# Altium PCB hat_template 2023.PcbDoc
Units mm, origin at the board's own origin, x right, y up, seen from the top; angles counter-clockwise.
Board outline 64 x 85 mm, 4 copper layers (Top Layer, Ground Plane, Power Plane, Bottom Layer), stack 0.844 mm thick; 3 components, 0 nets, 87 pads, 1 vias.
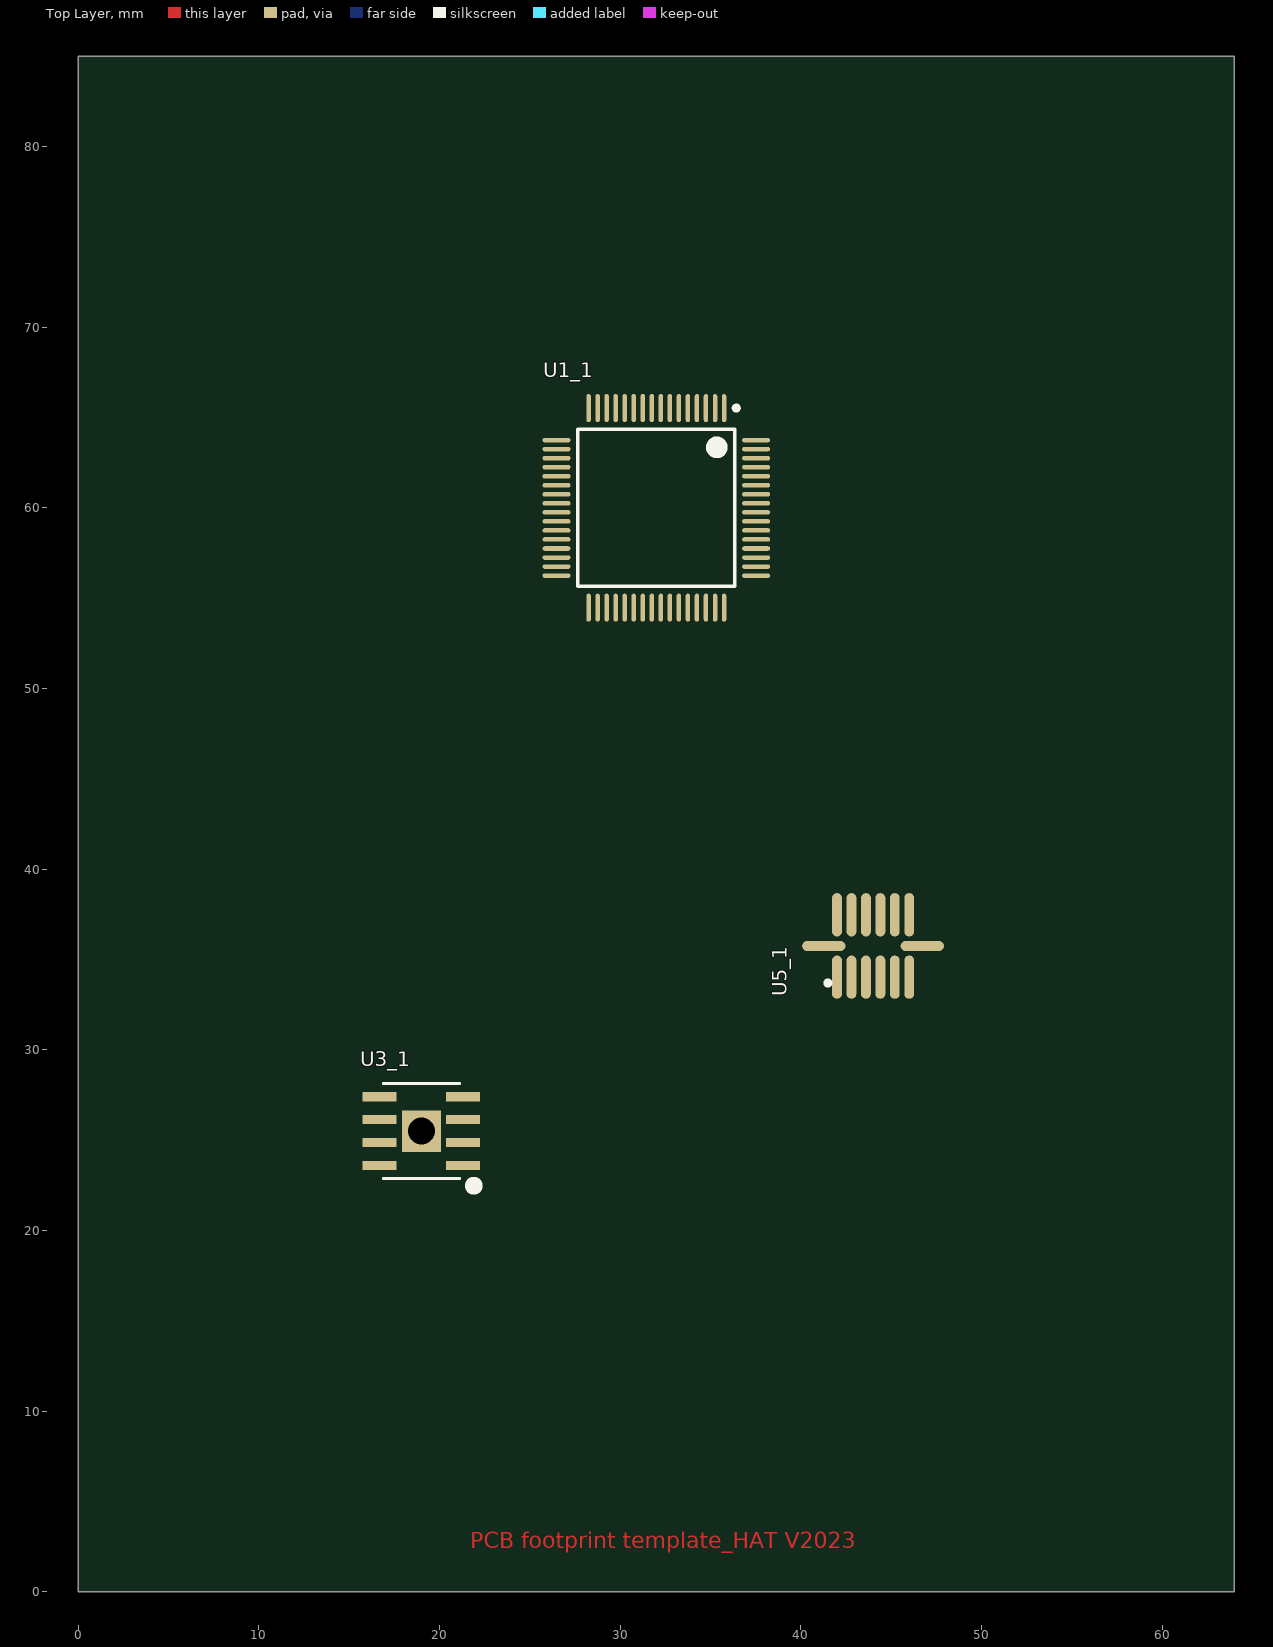
[diagram p0: Top Layer view]
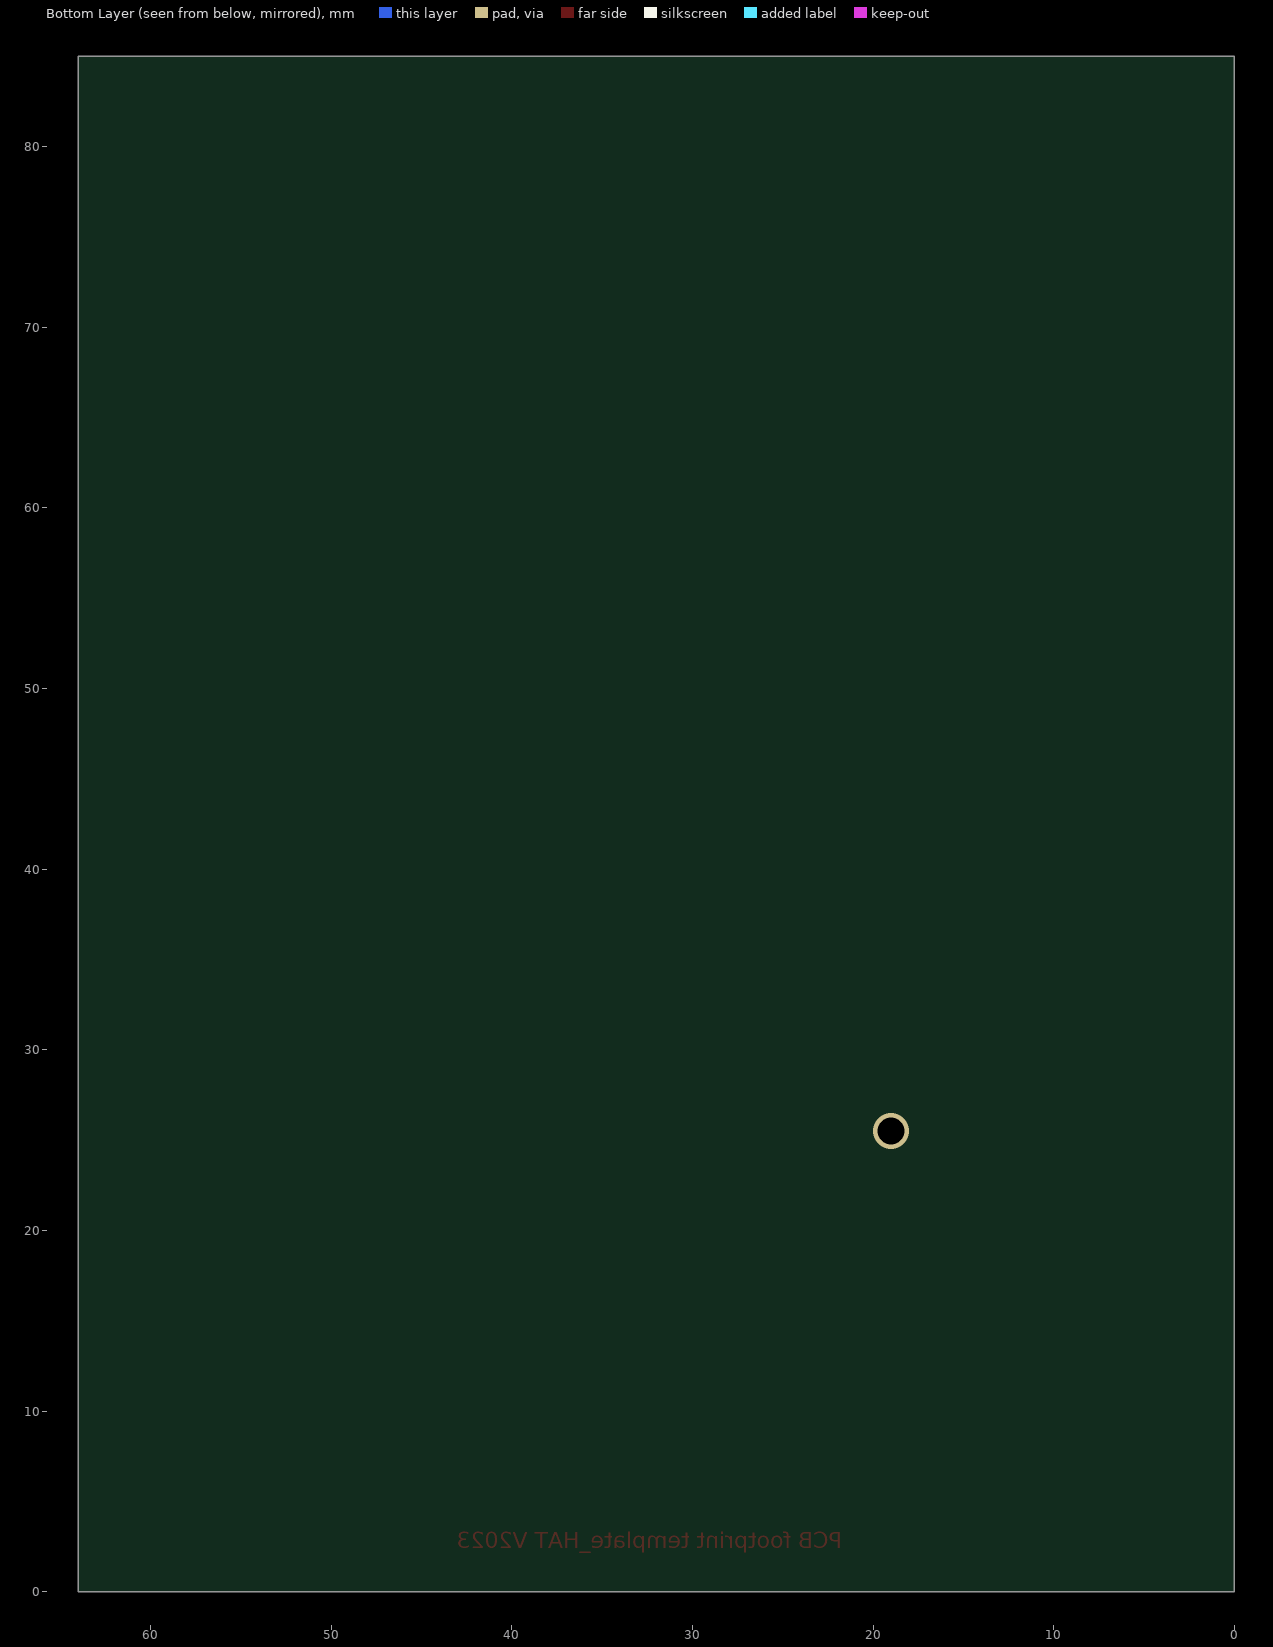
[diagram p1: Bottom Layer view, seen from below]
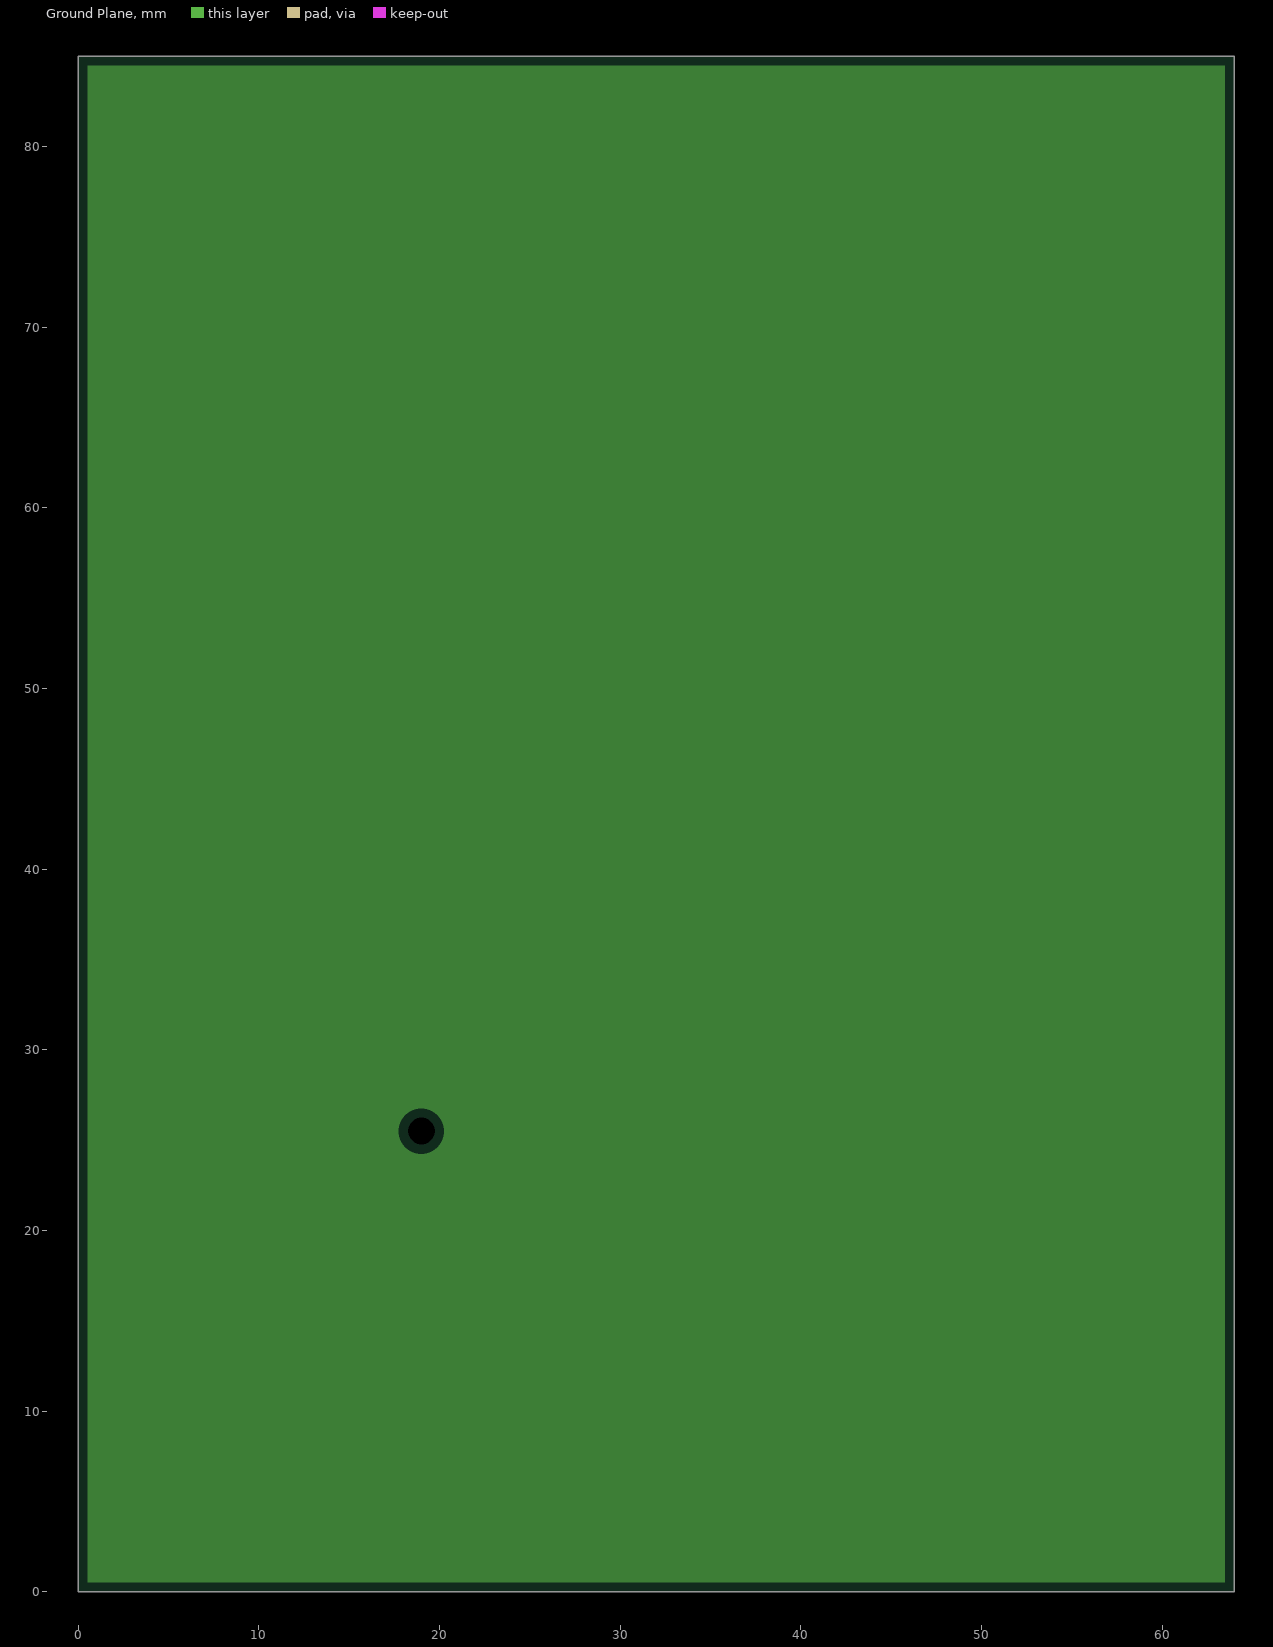
[diagram p2: Ground Plane, clearances drawn from the general rule]
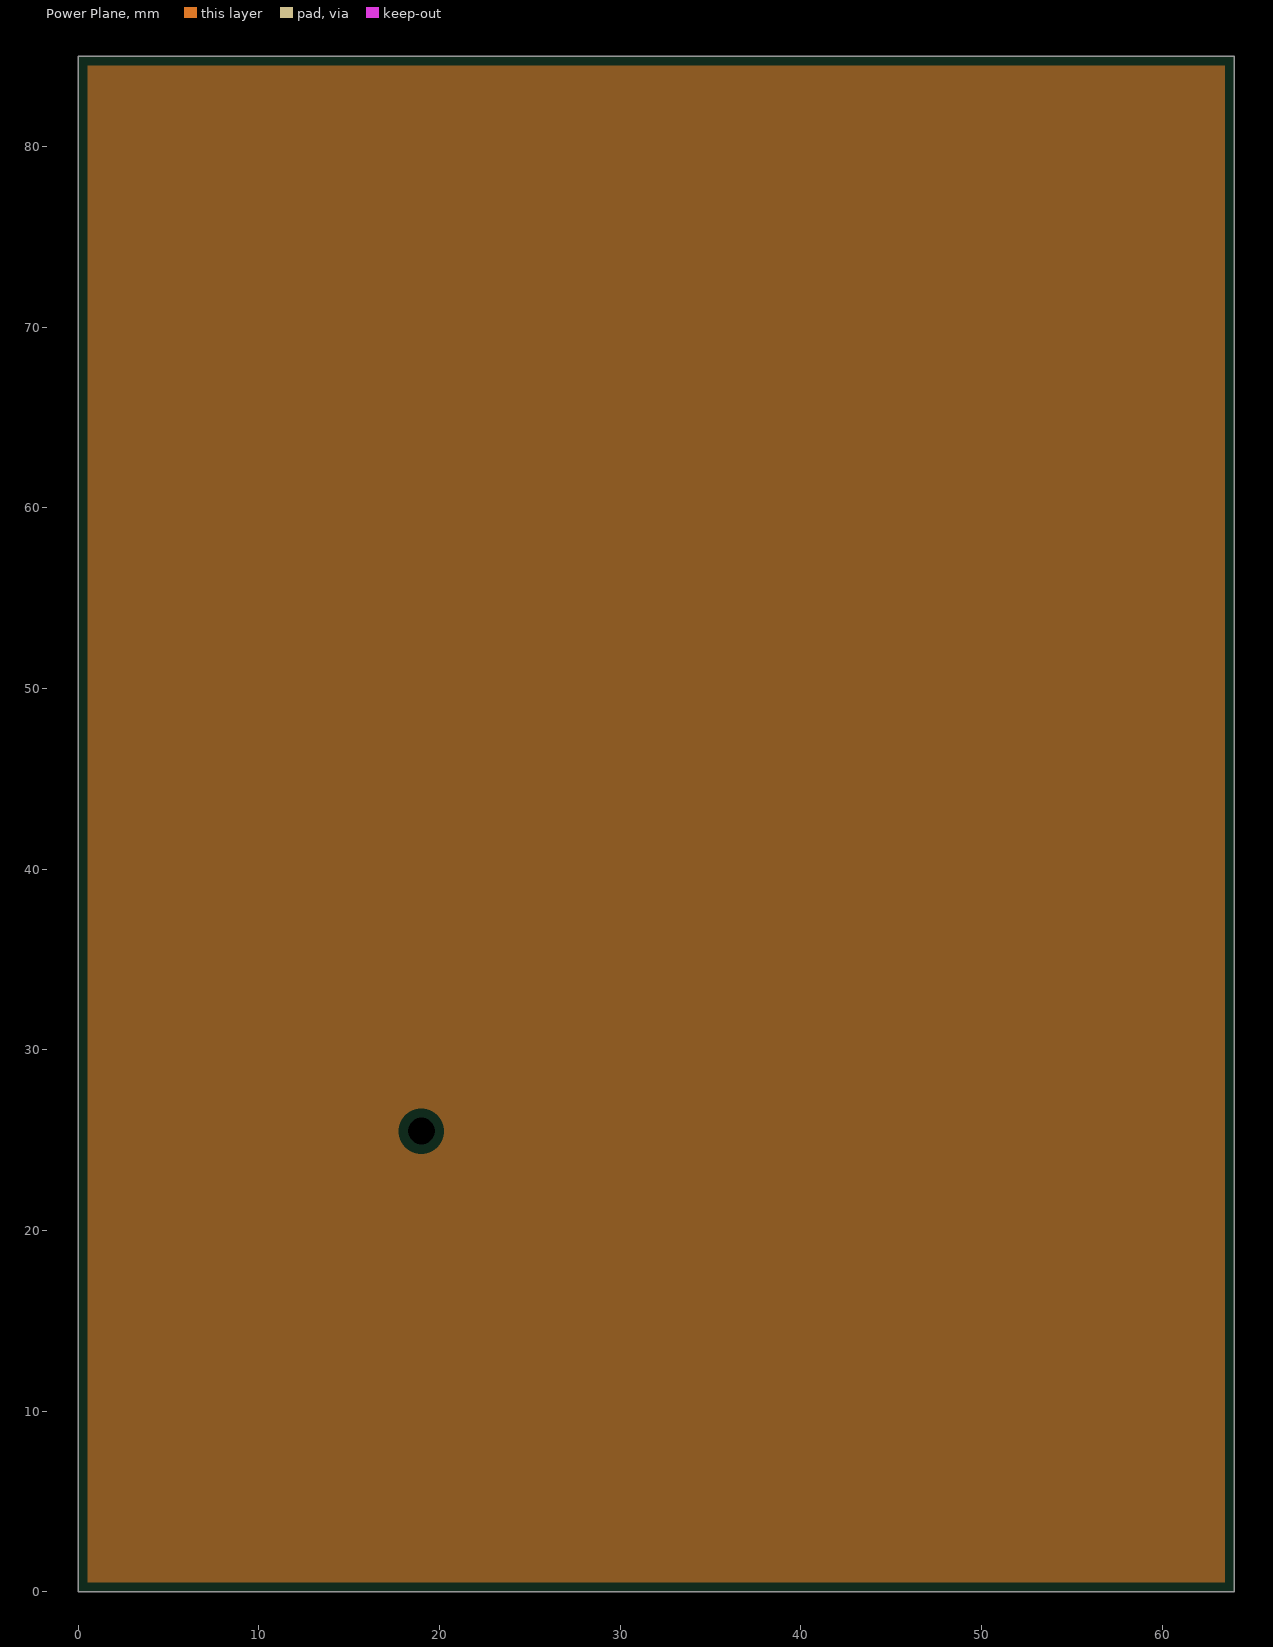
[diagram p3: Power Plane, clearances drawn from the general rule]

## Layer stack, top to bottom
Top Solder: solder mask 0.0102, Solder Resist, Dk 3.5
Top Layer: signal copper 0.0356
Dielectric 1: core 0.32, FR-4, Dk 4.8
Ground Plane: plane copper 0.036
Dielectric 3: prepreg 0.127, Dk 4.2
Power Plane: plane copper 0.036
Dielectric 4: core 0.254, Dk 4.2
Bottom Layer: signal copper 0.0356
Bottom Solder: solder mask 0.0102, Solder Resist, Dk 3.5

## Board outline
0,85 64,85 64,0 0,0 0,85

## Design rules (kind name [scope] priority, off if disabled: settings)
BoardOutlineClearance [All] p1: gap=0.5 ignorepadtopadclearanceinfootprint=FALSE
Clearance Min_Clearance_Circuit_Labs [All] p1: gap=0.15 ignorepadtopadclearanceinfootprint=FALSE except(0: Arc-Hole Track-Hole SMDPad-Hole THPad-Hole Via-Hole Fill-Hole Poly-Hole Region-Hole Text-Hole)
DiffPairsRouting [All] p1: maxlimit=0.254 minlimit=0.254 mostfreqgap=0.254 toplayer_minwidth=0.381 toplayer_maxwidth=0.381 toplayer_prefwidth=0.381 bottomlayer_minwidth=0.381 bottomlayer_maxwidth=0.381 bottomlayer_prefwidth=0.381 maxuncoupledlength=12.7
FanoutControl Fanout_BGA [IsBGA] p1 off: bgadir=Out bgaviamode=Centered fanoutstyle=Auto fanoutdirection=Alternating viagrid=0.025 // Fanout_BGA (Default Rule)
HoleSize [All] p1: absolutevalues=TRUE maxlimit=10 minlimit=0.3 maxpercent=80.000 minpercent=20.000
MinimumAnnularRing [All] p1: minimumring=0.1
MinimumSolderMaskSliver [All] p1: minsoldermaskwidth=0.25
NetAntennae [All] p1: netantennaetolerance=1
PasteMaskExpansion [All] p1 off: expansion=0
PlaneClearance [All] p1: clearance=0.508
PlaneConnect [All] p1: planeconnectstyle=Relief reliefexpansion=0.508 reliefentries=4 reliefconductorwidth=0.254 reliefairgap=0.254
PolygonConnect [All] p1: connectstyle=Relief reliefconductorwidth=0.254 reliefentries=4 polygonreliefangle="90 Angle" airgapwidth=0.254
RoutingVias [All] p1: holewidth=0.5 width=1 viastyle="Through Hole" minholewidth=0.3 minwidth=0.6 maxholewidth=1 maxwidth=2
SMDNeckDown [All] p1 off: percent=50.000
SMDToCorner [All] p1: distance=98425
SMDToPlane [All] p1: distance=1968504
SilkToSolderMaskClearance SilkscreenOverComponentPads [IsPad] p1: minsilkscreentomaskgap=0.254 clearancetoexposedcopper=TRUE
SolderMaskExpansion [All] p1: expansion=0.102
ViasUnderSMD [All] p1: allowed=FALSE
Width [All] p1: maxlimit=2 minlimit=0.15 preferedwidth=0.3
21 further rules are at their usual default settings.

## Classes and differential pairs
component class "wacky_Hat_schematic_2022_using accelerometer": U1_1 U5_1
component class wacky_CarHat_power_2022: U3_1
differential pair D: +"" -""

## Components (designator, comment, footprint, x,y, rotation, side; value= is the part's Value field where it differs from the comment)
U1_1 "ATSAM4S8BA-ANR" LQFP64_L 32,60 r270 top locked (schematic designator U1)
U3_1 "ADP2302ARDZ-5.0 BUCK" RD_8_1 19,25.5 r180 top locked value=Value (schematic designator U3)
U5_1 "ADXL345BCCZ" ADI-CC-14-1_V 44,35.75 r90 top locked (schematic designator U5)

## Footprints (in the part's own frame and the unit in brackets; to place one, negate y for a bottom-side part, rotate by r counter-clockwise, add the part's x,y. Pads: shape width x height; smd on the part's side, far side on the other; paste and mask are expansions set on the pad)
ADI-CC-14-1_V [mm]
  oval 2.4x0.55 smd: 1(-1.725,2) 2(-1.725,1.2) 3(-1.725,0.4) 4(-1.725,-0.4) 5(-1.725,-1.2) 6(-1.725,-2) 8(1.725,-2) 9(1.725,-1.2) 10(1.725,-0.4) 11(1.725,0.4) 12(1.725,1.2) 13(1.725,2)
  oval 0.55x2.4 smd: 7(0,-2.725) 14(0,2.725)
  silkscreen extent -2.18,2.37 -1.93,2.62, body extent -1.5,-2.5 1.5,2.5, height 1
LQFP64_L [mm] "Thin QFP, 64-Leads, Body 10x10mm, Pitch 0.5mm, IPC High Density"
  oval 1.55x0.25 smd mask+0.07: 1(-5.525,3.75) 2(-5.525,3.25) 3(-5.525,2.75) 4(-5.525,2.25) 5(-5.525,1.75) 6(-5.525,1.25) 7(-5.525,0.75) 8(-5.525,0.25) 9(-5.525,-0.25) 10(-5.525,-0.75) 11(-5.525,-1.25) 12(-5.525,-1.75) 13(-5.525,-2.25) 14(-5.525,-2.75) 15(-5.525,-3.25) 16(-5.525,-3.75) 33(5.525,-3.75) 34(5.525,-3.25) 35(5.525,-2.75) 36(5.525,-2.25) 37(5.525,-1.75) 38(5.525,-1.25) 39(5.525,-0.75) 40(5.525,-0.25) 41(5.525,0.25) 42(5.525,0.75) 43(5.525,1.25) 44(5.525,1.75) 45(5.525,2.25) 46(5.525,2.75) 47(5.525,3.25) 48(5.525,3.75)
  oval 0.25x1.55 smd mask+0.07: 17(-3.75,-5.525) 18(-3.25,-5.525) 19(-2.75,-5.525) 20(-2.25,-5.525) 21(-1.75,-5.525) 22(-1.25,-5.525) 23(-0.75,-5.525) 24(-0.25,-5.525) 25(0.25,-5.525) 26(0.75,-5.525) 27(1.25,-5.525) 28(1.75,-5.525) 29(2.25,-5.525) 30(2.75,-5.525) 31(3.25,-5.525) 32(3.75,-5.525) 49(3.75,5.525) 50(3.25,5.525) 51(2.75,5.525) 52(2.25,5.525) 53(1.75,5.525) 54(1.25,5.525) 55(0.75,5.525) 56(0.25,5.525) 57(-0.25,5.525) 58(-0.75,5.525) 59(-1.25,5.525) 60(-1.75,5.525) 61(-2.25,5.525) 62(-2.75,5.525) 63(-3.25,5.525) 64(-3.75,5.525)
  silkscreen extent -5.65,-4.35 4.35,4.55, body extent -5,-5 5,5, height 1.6
RD_8_1 [mil]
  rect 74x20 smd paste+0 mask+0: 1(-91,75) 2(-91,25) 3(-91,-25) 4(-91,-75) 5(91,-75) 6(91,-25) 7(91,25) 8(91,75)
  rect 84.65x90 smd paste-44.5 mask+0: EPAD(0,0)
  silkscreen extent -118,-104 84,123, body extent 0,0 10,10, height 10

## Part data
U1_1: library part SE_ATSAM4S16BA-MU, "IC MCU 32BIT 512KB FLASH 64LQFP", Manufacturer=Atmel, Package / Case=64-LQFP, Supplier Part Number 1=ATSAM4S8BA-ANRCT-ND, Voltage - Supply (Vcc/Vdd)="1.62 V ~ 3.6 V", Code_JEDEC=MO-220VMMD-3, ComponentLink1Description="Manufacturer URL", ComponentLink1URL=http://www.atmel.com/, ComponentLink2Description="SAM4S Series Datasheet", ComponentLink2URL=http://www.atmel.com/dyn/resources/prod_documents/11100.pdf, ComponentLink3Description="SAM4S Series Summary", ComponentLink3URL=http://www.atmel.com/dyn/resources/prod_documents/11100S.pdf, Connectivity="I²C, IrDA, Memory Card, SPI, SSC, UART/USART, USB", Core Processor="ARM® Cortex®-M4", Core Size=32-Bit, Data Converters="A/D 11x12b, D/A 2x12b", Manufacturer Part Number=ATSAM4S8BA-ANR, Number of I/O=47, PackageDescription="64-Pin Quad Flat No-Lead (QFN) Sawn, 9 x 9 x 1.0 mm Body, 0.5 mm Pitch, Exposed Pad", PackageReference=64PS, PackageVersion="revJ, Jul-2007", Packaging="Cut Tape (CT)", Peripherals="Brown-out Detect/Reset, DMA, POR, PWM, WDT", Program Memory Size="512KB (512K x 8)", Program Memory Type=FLASH, RAM Size="128K x 8", Speed=120MHz, Supplier 1=Digi-Key
U3_1: library part ADP2302ARDZ-5.0-R7, "IC REG BUCK 5V 2A 8SOIC", Current - Output=2A, Frequency - Switching=700kHz, Supplier Part Number 1=ADP2302ARDZ-5.0-R7CT-ND, Voltage - Input (Max)=20V, Voltage - Output (Min/Fixed)=5V, Manufacturer_Part_Number=ADP2302ARDZ-5.0-R7, Output Type=Fixed, Supplier 1=Digi-Key, Type=DEV, Vendor="Analog Devices Inc"
U5_1: "Accelerometer 3-Axis, +/-2 g / +/-4 g / +/-8 g / +/-16 g with Digital Output, 1.6 KHz BW, Industrial, 14-pin LGA, Tray", Manufacturer="Analog Devices", Supply Current="140 uA", Voltage Supply (V)="2.0 to 3.6", # of Axes=3, -3dB Bandwidth="1.6 KHz", ComponentLink1Description="Manufacturer URL", ComponentLink1URL=http://www.analog.com/en/index.html, ComponentLink2Description=Datasheet, ComponentLink2URL=http://www.analog.com/static/imported-files/data_sheets/ADXL345.pdf, ComponentLink3Description="Package Specification", ComponentLink3URL=http://www.analog.com/static/imported-files/data_sheets/ADXL343.pdf, ComponentLink4Description="Product URL", ComponentLink4URL=http://www.analog.com/en/mems-sensors/mems-inertial-sensors/adxl345/products/product.html, DatasheetVersion="Rev. D", Manufacturer 1="Analog Devices", Manufacturer Part Number 1=ADXL345BCCZ, Mounting Technology="Surface Mount", Output Type=Digital, PackageDescription="14-Pin Land Grid Array, 3 x 5 mm Body, 0.8 mm Pitch", PackageReference=CC-14-1, PackageVersion="03-16-2010-A, 03/2010", Packing=Tray, PartNumber=ADXL345BCCZ, Sensitivity="256/128/64/32 LSB/g"

## Via types
v1: diameter 2, hole 1.5, Top Layer to Bottom Layer, 1 vias

## Nets (pads, with @x,y where several pads share a name; then routed paths per layer and width w, separated by ;. In a path a pad name is that pad's centre, name@x,y a point inside that pad or via, vN(x,y) a via of type N, cw(c..) or ccw(c..) an arc to the next point about the centre after c; other vN are vias at no path point)
pads on no net: U1_1.1 U1_1.2 U1_1.3 U1_1.4 U1_1.5 U1_1.6 U1_1.7 U1_1.8 U1_1.9 U1_1.10 U1_1.11 U1_1.12 U1_1.13 U1_1.14 U1_1.15 U1_1.16 U1_1.17 U1_1.18 U1_1.19 U1_1.20 U1_1.21 U1_1.22 U1_1.23 U1_1.24 U1_1.25 U1_1.26 U1_1.27 U1_1.28 U1_1.29 U1_1.30 U1_1.31 U1_1.32 U1_1.33 U1_1.34 U1_1.35 U1_1.36 U1_1.37 U1_1.38 U1_1.39 U1_1.40 U1_1.41 U1_1.42 U1_1.43 U1_1.44 U1_1.45 U1_1.46 U1_1.47 U1_1.48 U1_1.49 U1_1.50 U1_1.51 U1_1.52 U1_1.53 U1_1.54 U1_1.55 U1_1.56 U1_1.57 U1_1.58 U1_1.59 U1_1.60 U1_1.61 U1_1.62 U1_1.63 U1_1.64 U3_1.1 U3_1.2 U3_1.3 U3_1.4 U3_1.5 U3_1.6 U3_1.7 U3_1.8 U3_1.EPAD U5_1.1 U5_1.2 U5_1.3 U5_1.4 U5_1.5 U5_1.6 U5_1.7 U5_1.8 U5_1.9 U5_1.10 U5_1.11 U5_1.12 U5_1.13 U5_1.14
copper on no net:
  other v1: 19,25.5

## Polygon pours and split planes (outlines as drawn)
no net on Ground Plane (split plane): 63.49,0.51 0.51,0.51 0.51,84.49 63.49,84.49
no net on Power Plane (split plane): 63.49,0.51 0.51,0.51 0.51,84.49 63.49,84.49

## Other copper
Top Layer:
  text "PCB footprint template_HAT V2023" at 21.7,2.1 h1.52

## Silkscreen, mask and mechanical layers (free items; w line width, h text height)
Board Outline:
  the board outline again, w0.254

## Dimensions
0,85 to 0,0 on Mechanical 1
64,86 to 0,86 on Mechanical 1

## Text inside footprints (layer, text, board x,y; h text height)
U3_1: Mechanical 13 "*" at 20.93,24.344 h1.27 r180